# Altium PCB Auxillary_Supply_UCC28740.PcbDoc
Units mm, origin at the board's own origin, x right, y up, seen from the top; angles counter-clockwise.
Board outline 100 x 50 mm, 2 copper layers (Top Layer, Bottom Layer); 94 components, 48 nets, 255 pads, 118 vias.
Unrouted connection lines stored in the file: 93.
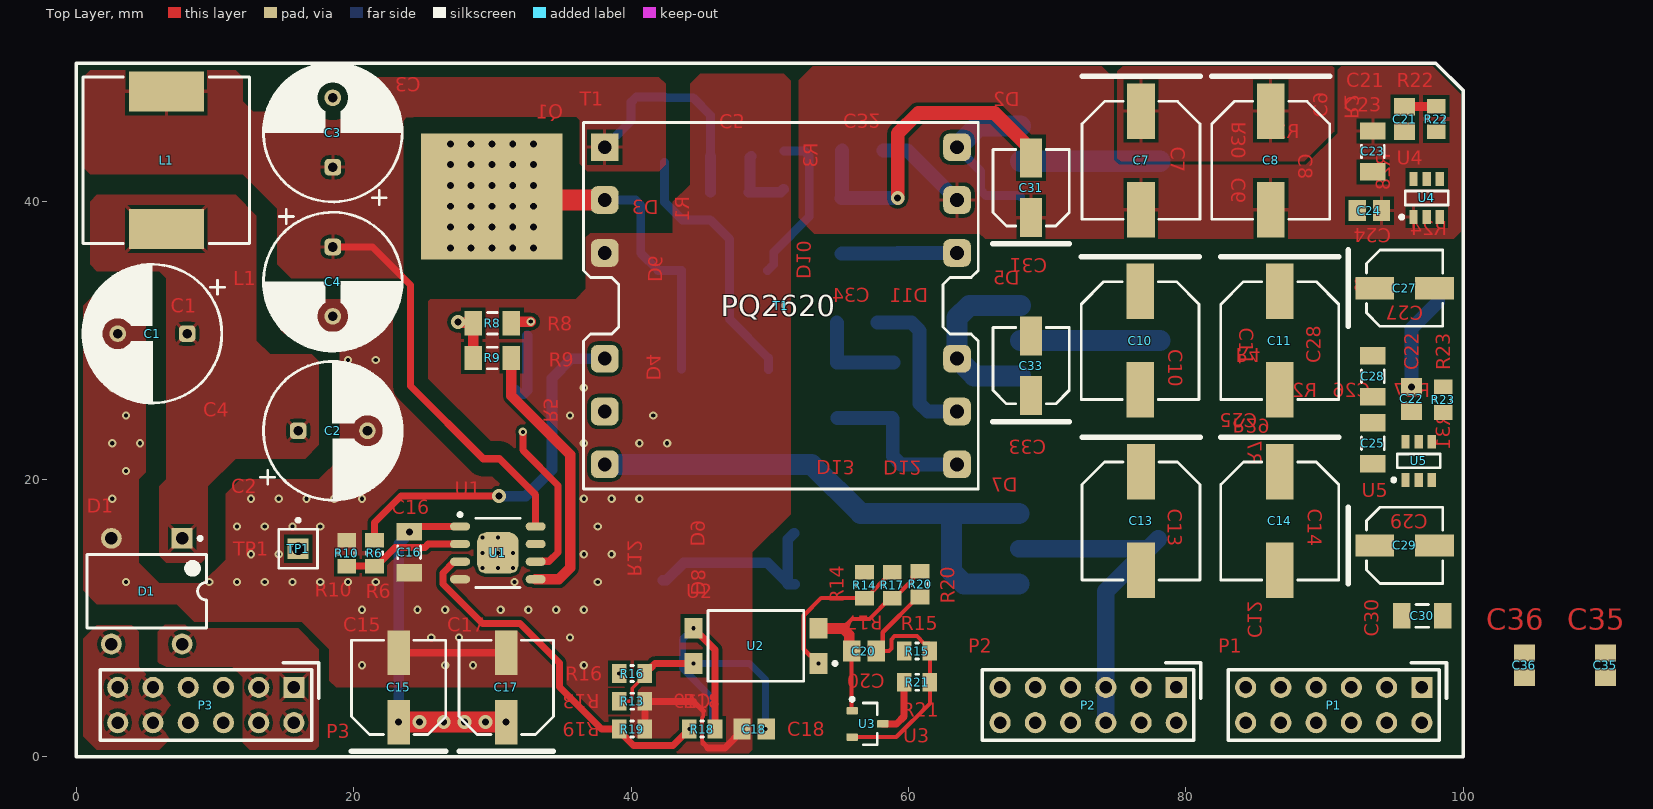
[diagram p0: Top Layer view]
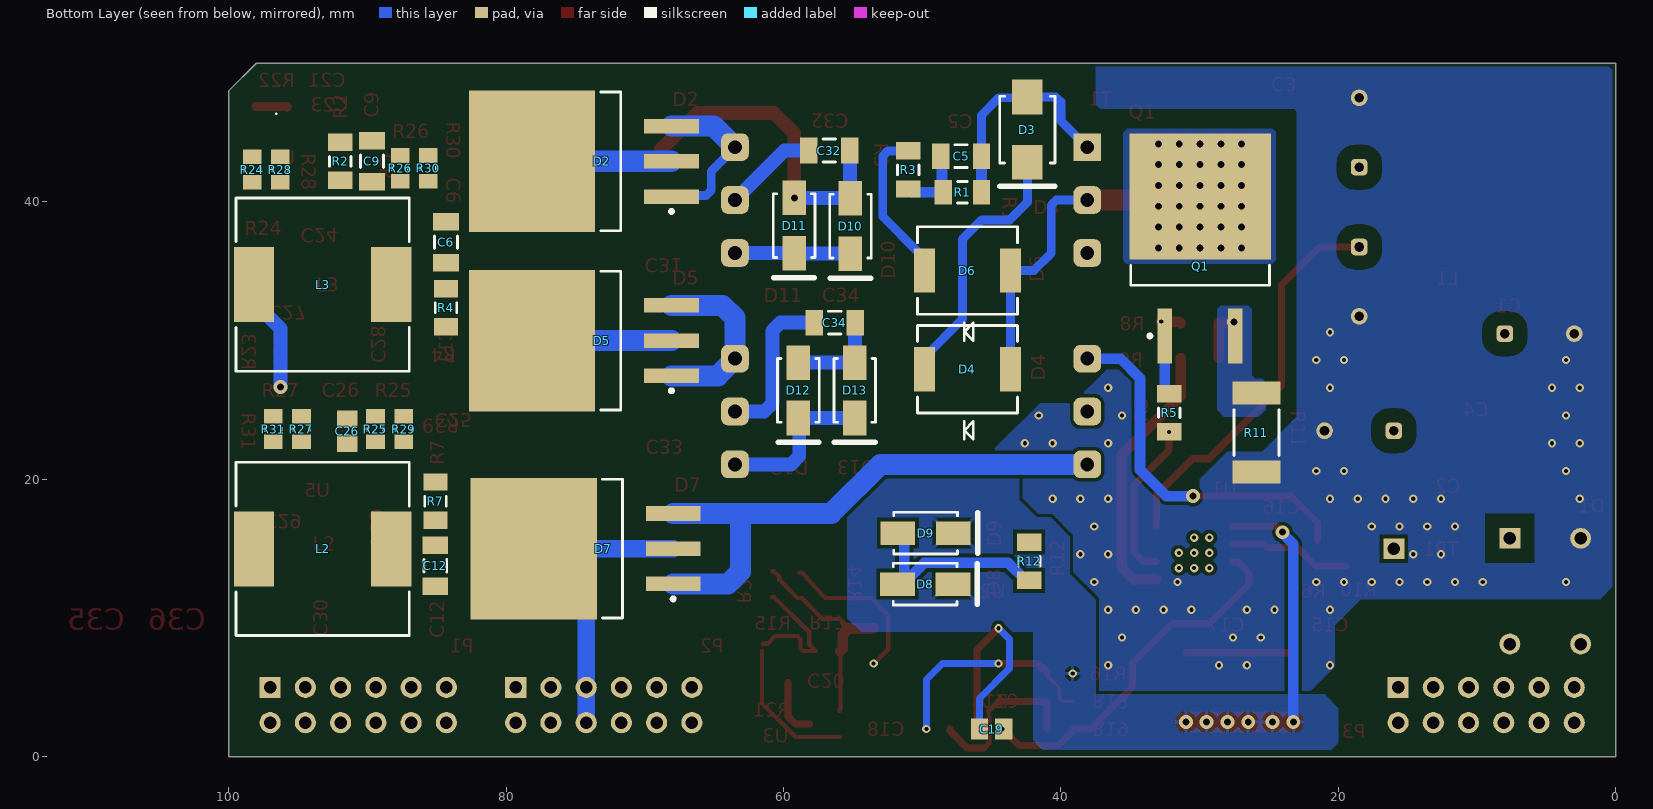
[diagram p1: Bottom Layer view, seen from below]

## Layer stack, top to bottom
Top Solder: solder mask 0.0254, SM-001, Dk 4
Top Layer: signal copper 0.0356
Dielectric 1: dielectric 0.32, FR-4, Dk 4.8
Bottom Layer: signal copper 0.0356
Bottom Solder: solder mask 0.0254, SM-001, Dk 4

## Board outline
0,0 0,50 98,50 100,48 100,0

## Design rules (kind name [scope] priority, off if disabled: settings)
AssemblyTestPointUsage [InNet('No Net')] p1:
AssemblyTestpoint [InNet('No Net')] p1: testpointundercomponent=TRUE minsize=1.016 maxsize=2.54 preferedsize=1.524 minholesize=0 maxholesize=1.016 preferedholesize=0.813 testpointgrid=0.025 usegrid=TRUE gridtolerance=0 allowsidetop=TRUE allowsidebottom=TRUE
Clearance "Schematic Clearance Constraint" [InNetClass('HV')] p1: gap=1.016 ignorepadtopadclearanceinfootprint=FALSE except(0.635: Arc-SMDPad Arc-Via Track-SMDPad Track-Via SMDPad-SMDPad SMDPad-Via)
Clearance Clearance_9 [All] p2: gap=0.254 ignorepadtopadclearanceinfootprint=FALSE except(0: Arc-Hole Track-Hole SMDPad-Hole THPad-Hole Via-Hole Fill-Hole Poly-Hole Region-Hole Text-Hole)
Clearance Clearance_8 [InNamedPolygon('GNDB')] p3: gap=0.254 ignorepadtopadclearanceinfootprint=FALSE except(0: Arc-Hole Track-Hole SMDPad-Hole THPad-Hole Via-Hole Fill-Hole Poly-Hole Region-Hole Text-Hole)
Clearance Clearance_7 [InNamedPolygon('GNDB')] p4: gap=0.254 ignorepadtopadclearanceinfootprint=FALSE except(0: Arc-Hole Track-Hole SMDPad-Hole THPad-Hole Via-Hole Fill-Hole Poly-Hole Region-Hole Text-Hole)
Clearance Clearance_6 [InNamedPolygon('GNDB')] p5: gap=0.254 ignorepadtopadclearanceinfootprint=FALSE except(0: Arc-Hole Track-Hole SMDPad-Hole THPad-Hole Via-Hole Fill-Hole Poly-Hole Region-Hole Text-Hole)
Clearance Clearance_5 [InNamedPolygon('GND_AUX')] p6: gap=0.254 ignorepadtopadclearanceinfootprint=FALSE except(0: Arc-Hole Track-Hole SMDPad-Hole THPad-Hole Via-Hole Fill-Hole Poly-Hole Region-Hole Text-Hole; 1.27: Arc-Fill Arc-Poly Arc-Region Track-Fill Track-Poly Track-Region SMDPad-Fill SMDPad-Poly SMDPad-Region THPad-Fill THPad-Poly THPad-Region Via-Fill Via-Poly Via-Region Fill-Fill Fill-Poly Fill-Region Poly-Poly Poly-Region Region-Region)
Clearance Clearance_4 [InNamedPolygon('GNDAUX')] p7: gap=0.508 ignorepadtopadclearanceinfootprint=FALSE except(0: Arc-Hole Track-Hole SMDPad-Hole THPad-Hole Via-Hole Fill-Hole Poly-Hole Region-Hole Text-Hole; 0.254: Arc-Arc Arc-Track Arc-Via Arc-Text Track-Track Track-Via Track-Text SMDPad-Via SMDPad-Text THPad-THPad THPad-Via THPad-Text Via-Via Via-Text Fill-Text Poly-Text Region-Text Text-Text)
Clearance Clearance_3 [InNamedPolygon('NONET_L01_P003')] p8: gap=0.254 ignorepadtopadclearanceinfootprint=FALSE except(0: Arc-Hole Track-Hole SMDPad-Hole THPad-Hole Via-Hole Fill-Hole Poly-Hole Region-Hole Text-Hole; 1: Arc-Fill Arc-Poly Arc-Region Track-Fill Track-Poly Track-Region SMDPad-Fill SMDPad-Poly SMDPad-Region THPad-Fill THPad-Poly THPad-Region Via-Fill Via-Poly Via-Region Fill-Fill Fill-Poly Fill-Region Poly-Poly Poly-Region Region-Region)
Clearance Clearance_2 [InNamedPolygon('HV1')] p9: gap=0.254 ignorepadtopadclearanceinfootprint=FALSE except(0: Arc-Hole Track-Hole SMDPad-Hole THPad-Hole Via-Hole Fill-Hole Poly-Hole Region-Hole Text-Hole)
Clearance Soldermask [InNamedPolygon('Top')] p10: gap=0.254 ignorepadtopadclearanceinfootprint=FALSE except(0: Arc-Hole Track-Hole SMDPad-Hole THPad-Hole Via-Hole Fill-Hole Poly-Hole Region-Hole Text-Hole; 0.5: Arc-Poly Track-Fill Track-Poly SMDPad-Fill SMDPad-Poly THPad-Fill THPad-Poly Via-Fill Via-Poly Fill-Fill Fill-Poly Poly-Poly)
Clearance Clearance_1 [InNamedPolygon('Top')] p11: gap=0.254 ignorepadtopadclearanceinfootprint=FALSE except(0: Arc-Hole Track-Hole SMDPad-Hole THPad-Hole Via-Hole Fill-Hole Poly-Hole Region-Hole Text-Hole; 0.5: Arc-Arc Arc-Track Track-Track)
Clearance [InNet('No Net')] p12: gap=0.254 ignorepadtopadclearanceinfootprint=FALSE except(0: Arc-Hole Track-Hole SMDPad-Hole THPad-Hole Via-Hole Fill-Hole Poly-Hole Region-Hole Text-Hole)
FabricationTestPointUsage [All] p1: valid=0 allowmultiple=TRUE
FabricationTestpoint [All] p1: side=3 testpointundercomponent=FALSE minsize=1.016 maxsize=2.54 preferedsize=1.524 minholesize=0 maxholesize=1.016 preferedholesize=0.813 testpointgrid=0.025 allowsidetop=TRUE allowsidebottom=TRUE usegrid=TRUE gridtolerance=0
Height [All] p1: minheight=0 maxheight=27.94 prefheight=12.7
MinimumSolderMaskSliver [All] p1: minsoldermaskwidth=0.127
PolygonConnect PolygonConnect_14 [All vs IsNamedPolygon('GNDAUX')] p1: connectstyle=Direct reliefconductorwidth=0.254 reliefentries=4 polygonreliefangle="90 Angle" airgapwidth=0.254
PolygonConnect PolygonConnect_13 [All vs IsNamedPolygon('FET_Source')] p2: connectstyle=Direct reliefconductorwidth=0.254 reliefentries=4 polygonreliefangle="90 Angle" airgapwidth=0.254
PolygonConnect PolygonConnect_12 [All vs IsNamedPolygon('FET_Source')] p3: thpad.connectstyle=Direct thpad.reliefconductorwidth=0.254 thpad.reliefentries=4 thpad.polygonreliefangle="90 Angle" thpad.airgapwidth=0.254 smdpad.connectstyle=Direct smdpad.reliefconductorwidth=0.254 smdpad.reliefentries=4 smdpad.polygonreliefangle="90 Angle" smdpad.airgapwidth=0.254 via.connectstyle=Relief via.reliefconductorwidth=0.254 via.reliefentries=4 via.polygonreliefangle="90 Angle" via.airgapwidth=0.254
PolygonConnect PolygonConnect_11 [All vs IsNamedPolygon('VCC_AUX')] p4: thpad.connectstyle=Relief thpad.reliefconductorwidth=0.254 thpad.reliefentries=4 thpad.polygonreliefangle="45 Angle" thpad.airgapwidth=0.254 smdpad.connectstyle=Relief smdpad.reliefconductorwidth=0.254 smdpad.reliefentries=4 smdpad.polygonreliefangle="45 Angle" smdpad.airgapwidth=0.254 via.connectstyle=Relief via.reliefconductorwidth=0.254 via.reliefentries=4 via.polygonreliefangle="90 Angle" via.airgapwidth=0.254
PolygonConnect PolygonConnect_10 [All vs IsNamedPolygon('FET_Source')] p5: thpad.connectstyle=Direct thpad.reliefconductorwidth=0.254 thpad.reliefentries=4 thpad.polygonreliefangle="90 Angle" thpad.airgapwidth=0.254 smdpad.connectstyle=Direct smdpad.reliefconductorwidth=0.254 smdpad.reliefentries=4 smdpad.polygonreliefangle="90 Angle" smdpad.airgapwidth=0.254 via.connectstyle=Relief via.reliefconductorwidth=0.254 via.reliefentries=4 via.polygonreliefangle="90 Angle" via.airgapwidth=0.254
PolygonConnect PolygonConnect_9 [All vs IsNamedPolygon('GND_AUX')] p6: thpad.connectstyle=Direct thpad.reliefconductorwidth=0.254 thpad.reliefentries=4 thpad.polygonreliefangle="90 Angle" thpad.airgapwidth=0.254 smdpad.connectstyle=Direct smdpad.reliefconductorwidth=0.254 smdpad.reliefentries=4 smdpad.polygonreliefangle="90 Angle" smdpad.airgapwidth=0.254 via.connectstyle=Relief via.reliefconductorwidth=0.254 via.reliefentries=4 via.polygonreliefangle="90 Angle" via.airgapwidth=0.254
PolygonConnect PolygonConnect_8 [All vs IsNamedPolygon('FET_Drain')] p7: thpad.connectstyle=Direct thpad.reliefconductorwidth=0.254 thpad.reliefentries=4 thpad.polygonreliefangle="90 Angle" thpad.airgapwidth=0.254 smdpad.connectstyle=Direct smdpad.reliefconductorwidth=0.254 smdpad.reliefentries=4 smdpad.polygonreliefangle="90 Angle" smdpad.airgapwidth=0.254 via.connectstyle=Relief via.reliefconductorwidth=0.254 via.reliefentries=4 via.polygonreliefangle="90 Angle" via.airgapwidth=0.254
PolygonConnect PolygonConnect_7 [All vs IsNamedPolygon('FET_Source')] p8: thpad.connectstyle=Direct thpad.reliefconductorwidth=0.254 thpad.reliefentries=4 thpad.polygonreliefangle="90 Angle" thpad.airgapwidth=0.254 smdpad.connectstyle=Direct smdpad.reliefconductorwidth=0.254 smdpad.reliefentries=4 smdpad.polygonreliefangle="90 Angle" smdpad.airgapwidth=0.254 via.connectstyle=Relief via.reliefconductorwidth=0.254 via.reliefentries=4 via.polygonreliefangle="90 Angle" via.airgapwidth=0.254
PolygonConnect PolygonConnect_6 [All vs IsNamedPolygon('FET_Drain')] p9: thpad.connectstyle=Direct thpad.reliefconductorwidth=0.254 thpad.reliefentries=4 thpad.polygonreliefangle="90 Angle" thpad.airgapwidth=0.254 smdpad.connectstyle=Direct smdpad.reliefconductorwidth=0.254 smdpad.reliefentries=4 smdpad.polygonreliefangle="90 Angle" smdpad.airgapwidth=0.254 via.connectstyle=Relief via.reliefconductorwidth=0.254 via.reliefentries=4 via.polygonreliefangle="90 Angle" via.airgapwidth=0.254
PolygonConnect PolygonConnect_5 [All vs IsNamedPolygon('FET_Source')] p10: thpad.connectstyle=Direct thpad.reliefconductorwidth=0.254 thpad.reliefentries=4 thpad.polygonreliefangle="90 Angle" thpad.airgapwidth=0.254 smdpad.connectstyle=Direct smdpad.reliefconductorwidth=0.254 smdpad.reliefentries=4 smdpad.polygonreliefangle="90 Angle" smdpad.airgapwidth=0.254 via.connectstyle=Relief via.reliefconductorwidth=0.254 via.reliefentries=4 via.polygonreliefangle="90 Angle" via.airgapwidth=0.254
PolygonConnect PolygonConnect_4 [All vs IsNamedPolygon('GNDAUX')] p11: connectstyle=Relief reliefconductorwidth=0.254 reliefentries=4 polygonreliefangle="90 Angle" airgapwidth=0.254
PolygonConnect PolygonConnect_3 [All vs IsNamedPolygon('GNDAUX')] p12: thpad.connectstyle=Direct thpad.reliefconductorwidth=0.254 thpad.reliefentries=4 thpad.polygonreliefangle="90 Angle" thpad.airgapwidth=0.254 smdpad.connectstyle=Direct smdpad.reliefconductorwidth=0.254 smdpad.reliefentries=4 smdpad.polygonreliefangle="90 Angle" smdpad.airgapwidth=0.254 via.connectstyle=Relief via.reliefconductorwidth=0.254 via.reliefentries=4 via.polygonreliefangle="90 Angle" via.airgapwidth=0.254
PolygonConnect PolygonConnect_2 [All vs IsNamedPolygon('GNDAUX') Or IsNamedPolygon('HV1') Or IsNamedPolygon('FET_Source') Or IsNamedPolygon('LIVE') Or IsNamedPolygon('NEUTRAL')] p13: connectstyle=Relief reliefconductorwidth=0.254 reliefentries=4 polygonreliefangle="45 Angle" airgapwidth=0.254
PolygonConnect PolygonConnect_1 [All vs IsNamedPolygon('HV1')] p14: connectstyle=Relief reliefconductorwidth=0.254 reliefentries=4 polygonreliefangle="90 Angle" airgapwidth=0.254
PolygonConnect [All] p15: connectstyle=Relief reliefconductorwidth=0.254 reliefentries=4 polygonreliefangle="90 Angle" airgapwidth=0.254
RoutingVias [All] p1: holewidth=0.3 width=0.6 viastyle="Through Hole" minholewidth=0.3 minwidth=0.6 maxholewidth=1 maxwidth=2
SilkToSilkClearance [All] p1: silktosilkclearance=0.2
SilkToSolderMaskClearance [IsPad] p1: minsilkscreentomaskgap=0.2 clearancetoexposedcopper=TRUE
SolderMaskExpansion [All] p1: expansion=0.102 istentingtop=FALSE
UnRoutedNet [All] p1: checkbadconnections=TRUE
Width [All] p1: maxlimit=1.524 minlimit=0.254 preferedwidth=0.762 minimp=50.000000 maximp=50.000000 favimp=50.000000
21 further rules are at their usual default settings.

## Classes and differential pairs
net class HV: HV LIVE NetC1_1 NetD4_1

## Components (designator, comment, footprint, x,y, rotation, side; value= is the part's Value field where it differs from the comment)
C1 "400V" 10UF_400V 8,30.5 r180 top value=10uF
C2 "400V" 10UF_400V 16,23.5 r0 top value=10uF
C3 "400V" 10UF_400V 18.5,42.5 r90 top value=10uF
C4 "400V" 10UF_400V 18.5,36.75 r270 top value=10uF
C5 "Cap_1206" CHIP_CAP_1206 47.2,43.3 r180 bottom value=100pF
C6 "Cap_1206" CHIP_CAP_1206 84.328,37.084 r270 bottom value=100pF
C7 "100uF" PNSC-FK-V-F_V 76.762,43 r270 top
C8 "100uF" PNSC-FK-V-F_V 86.106,43 r270 top
C9 "Cap_1206" CHIP_CAP_1206 89.662,42.926 r270 bottom value=100pF
C10 "100uF" PNSC-FK-V-F_V 76.698,30 r270 top
C11 "100uF" PNSC-FK-V-F_V 86.762,30 r270 top
C12 "Cap_1206" CHIP_CAP_1206 85.09,13.765 r270 bottom value=100pF
C13 "100uF" PNSC-FK-V-F_V 76.762,17 r270 top
C14 "100uF" PNSC-FK-V-F_V 86.762,17 r270 top
C15 "47uF" PNSC-FP-V-D_V 23.25,5 r90 top
C16 "Cap_1206" CHIP_CAP_1206 24,14.75 r90 top value=100nF
C17 "47uF" PNSC-FP-V-D_V 31,5 r90 top
C18 "Cap_0805" CHIP_CAP_0805 48.875,2 r0 top value=100pF
C19 "Cap_0805" CHIP_CAP_0805 45,2 r180 bottom value=100pF
C20 "Cap_0805" CHIP_CAP_0805 56.79,7.62 r0 top value=100pF
C21 "Cap_0805" CHIP_CAP_0805 95.758,45.974 r270 top value=100pF
C22 "Cap_0805" CHIP_CAP_0805 96.266,25.795 r90 top value=100pF
C23 "Cap_1206" CHIP_CAP_1206 93.472,43.639 r90 top value=10uF
C24 "Cap_0805" CHIP_CAP_0805 93.218,39.37 r0 top value=100pF
C25 "Cap_1206" CHIP_CAP_1206 93.472,22.606 r90 top value=10uF
C26 "Cap_0805" CHIP_CAP_0805 91.44,23.481 r90 bottom value=100pF
C27 "EEEFP1E220AR" PNSC-FP-V-C_V 95.758,33.782 r0 top
C28 "Cap_1206" CHIP_CAP_1206 93.472,27.432 r270 top value=100nF
C29 "EEEFP1E220AR" PNSC-FP-V-C_V 95.758,15.24 r0 top
C30 "Cap_1206" CHIP_CAP_1206 97.028,10.16 r180 top value=100nF
C31 "EEEFP1E220AR" PNSC-FP-V-C_V 68.834,41.021 r90 top
C32 "Cap_1206" Chip_CAP_1206 56.7,43.7 r180 bottom value=100nF
C33 "EEEFP1E220AR" PNSC-FP-V-C_V 68.834,28.194 r90 top
C34 "Cap_1206" Chip_CAP_1206 56.3,31.3 r180 bottom value=100nF
C35 "Cap_0805" Chip_CAP_0805 110.236,6.604 r90 top value=100pF
C36 "Cap_0805" Chip_CAP_0805 104.394,6.604 r90 top value=100pF
D1 "DF10M" DF10M 5.09,11.938 r270 top
D2 "STPS3030C6" DPAK254P1542X450-4N 74.422,42.926 r0 bottom
D3 "SMBJ33A" FAIR-DO-214AA-2_V 42.418,45.212 r270 bottom
D4 "SS36-E3/57T" VISH-DO-214AB-2_V 46.736,27.94 r0 bottom
D5 "STPS3030C6" DPAK254P1542X450-4N 74.422,30 r0 bottom
D6 "SS36-E3/57T" VISH-DO-214AB-2_V 46.736,35.052 r0 bottom
D7 "STPS3030C6" DPAK254P1542X450-4N 74.3,15 r0 bottom
D8 "B360A-13-F" DIOD-B360A_V 49.784,12.446 r180 bottom
D9 "B360A-13-F" DIOD-B360A_V 49.752,16.129 r180 bottom
D10 "B360A-13-F" DIOD-B360A_V 55.172,38.258 r270 bottom
D11 "B360A-13-F" DIOD-B360A_V 59.236,38.29 r270 bottom
D12 "B360A-13-F" DIOD-B360A_V 58.928,26.416 r270 bottom
D13 "B360A-13-F" DIOD-B360A_V 54.864,26.416 r270 bottom
L1 "CDRH127NP-100MC" SUMI-CDRH127_V 6.5,43 r180 top
L2 "5.6uH" WE-PD-L 93.218,14.986 r180 bottom
L3 "5.6uH" WE-PD-L 93.218,34.036 r180 bottom
P1 "Header 6X2H" HEADER_6X2 97,5 r270 top
P2 "Header 6X2H" HEADER_6X2 79.3,5 r270 top
P3 "Header 6X2H" HEADER_6X2 15.7,5 r270 top
Q1 "NMOS-2" "DPAK254P1542X450-3N - THERMAL" 29.972,36.686 r90 bottom
R1 "Res_1206" CHIP_RES_1206 47.1,40.7 r180 bottom value=1K
R2 "Res_1206" CHIP_RES_1206 91.948,42.926 r270 bottom value=10K
R3 "Res_1206" CHIP_RES_1206 51,42.3 r270 bottom value=1K
R4 "Res_1206" CHIP_RES_1206 84.328,32.363 r90 bottom value=10K
R5 "Res_1206" CHIP_RES_1206 32.2,24.8 r90 bottom value=10E
R6 "Res_0805" CHIP_RES_0805 21.5,14.675 r90 top value=105K
R7 "Res_1206" CHIP_RES_1206 85.09,18.437 r270 bottom value=10K
R8 "Res_1206" CHIP_RES_1206 30,31.25 r0 top value=10K
R9 "Res_1206" CHIP_RES_1206 30,28.75 r180 top value=1.5K
R10 "Res_0805" CHIP_RES_0805 19.5,14.675 r270 top value=28.7K
R11 "Res_2512" CHIP2PINSM127P600-8N_2512 25.908,23.368 r90 bottom value=0.56E
R12 "Res_1206" CHIP_RES_1206 42.291,14.097 r90 bottom value=JUMPER
R13 "Res_0805" CHIP_RES_0805 40.075,4 r0 top value=10K
R14 "Res_0805" CHIP_RES_0805 56.83,12.37 r90 top value=1K
R15 "Res_0805" CHIP_RES_0805 60.615,7.62 r0 top value=180K
R16 "Res_0805" CHIP_RES_0805 40.075,6 r180 top value=1E
R17 "Res_0805" CHIP_RES_0805 58.83,12.37 r90 top value=1K
R18 "Res_0805" CHIP_RES_0805 45.125,2 r0 top value=205K
R19 "Res_0805" CHIP_RES_0805 40.075,2 r180 top value=18.7K
R20 "Res_0805" CHIP_RES_0805 60.83,12.445 r90 top value=NC
R21 "Res_0805" CHIP_RES_0805 60.615,5.37 r0 top value=39K
R22 "Res_0805" CHIP_RES_0805 98.044,45.974 r270 top value=105K
R23 "Res_0805" CHIP_RES_0805 98.552,25.745 r90 top value=105K
R24 "Res_0805" CHIP_RES_0805 98.298,42.327 r90 bottom value=15.49K
R25 "Res_0805" CHIP_RES_0805 89.408,23.622 r90 bottom value=15.49K
R26 "Res_0805" CHIP_RES_0805 87.63,42.418 r90 bottom value=105K
R27 "Res_0805" CHIP_RES_0805 94.742,23.622 r90 bottom value=105K
R28 "Res_0805" CHIP_RES_0805 96.266,42.327 r90 bottom value=5.49K
R29 "Res_0805" CHIP_RES_0805 87.376,23.622 r90 bottom value=5.49K
R30 "Res_0805" CHIP_RES_0805 85.598,42.418 r90 bottom value=105K
R31 "Res_0805" CHIP_RES_0805 96.774,23.622 r90 bottom value=105K
T1 "EE25-Epcos Horizontal_12_Pin" PQ26_20 50.8,32.512 r0 top
TP1 "Test Point" PIN1 16,15 r0 top
U1 "UCC28740-Q1" SOIC127P570X175_HS-9N 30.4,14.7 r0 top
U2 "PC817" LTV-817 49,8 r180 top
U3 "TL431ACDBZR" DBZ0003A_L 57.04,2.37 r0 top
U4 "TPS56339DDCR" SOT95P278X110-6N 97.348,40.281 r90 top value=Value
U5 "TPS56339DDCR" SOT95P278X110-6N 96.774,21.336 r90 top value=Value

## Footprints (in the part's own frame and the unit in brackets; to place one, negate y for a bottom-side part, rotate by r counter-clockwise, add the part's x,y. Pads: shape width x height; smd on the part's side, far side on the other; paste and mask are expansions set on the pad)
10UF_400V [mm]
  rrect50% 1.2x1.2 hole 0.7: 1(0,0)
  round 1.2 hole 0.7: 2(5,0)
  silkscreen extent -9.05,-5 7.5,6, body extent -2.5,-5 7.5,5, height 10.5
CHIP2PINSM127P600-8N_2512 [mm]
  rect 1.65x3.45 smd: 1(-2.85,0) 2(2.85,0)
  silkscreen extent -1.65,-1.63 1.65,1.63, body extent -3.3,-1.72 3.3,1.72, height 0.8
CHIP_CAP_0805 [mm]
  rect 1.25x1.5 smd: 1(-0.875,0) 2(0.875,0)
  body extent -1.1,-0.72 1.1,0.72, height 1.2
Chip_CAP_0805 [mm]
  rect 1.25x1.5 smd: 1(-0.875,0) 2(0.875,0)
  body extent -1.1,-0.72 1.1,0.72, height 1.2
CHIP_CAP_1206 [mm]
  rect 1.25x1.85 smd: 1(-1.475,0) 2(1.475,0)
  silkscreen extent -0.45,-0.82 0.45,0.82, body extent -1.7,-0.9 1.7,0.9, height 1.4
Chip_CAP_1206 [mm]
  rect 1.25x1.85 smd: 1(-1.475,0) 2(1.475,0)
  silkscreen extent -0.45,-0.82 0.45,0.82, body extent -1.7,-0.9 1.7,0.9, height 1.4
CHIP_RES_0805 [mm]
  rect 1.05x1.35 smd: 1(-0.925,0) 2(0.925,0)
  silkscreen extent -0.1,-0.58 0.1,0.58, body extent -1.07,-0.67 1.07,0.67, height 0.5
CHIP_RES_1206 [mm]
  rect 1.25x1.75 smd: 1(-1.375,0) 2(1.375,0)
  silkscreen extent -0.35,-0.77 0.35,0.77, body extent -1.63,-0.87 1.63,0.87, height 0.55
DBZ0003A_L [mm] "SOT23, 3-Leads, Body 3.04x1.4mm, Pitch 0.95mm, IPC High Density"
  rrect18% 0.8x0.55 smd: 1(-1.1,0.95) 2(-1.1,-0.95) 3(1.1,0)
  silkscreen extent -1.22,-1.5 0.7,1.9, body extent -1.26,-1.46 1.26,1.46, height 0.96
DF10M [mm]
  rect 1.5x1.5 hole 0.9: 1(-3.81,2.55)
  round 1.5 hole 0.9: 2(-3.81,-2.55) 3(3.81,-2.55) 4(3.81,2.55)
  silkscreen extent -3.93,-4.3 2.65,4.3, body extent -4.01,-4.32 4.01,4.18, height 3.5
DIOD-B360A_V [mm] "Molded Diode, 2-Leads, Body 4.60x2.92mm"
  rect 2.5x1.7 smd: 1(-2,0) 2(2,0)
  silkscreen extent -2.3,-1.5 3.75,1.5, body extent -2.52,-1.46 2.52,1.46, height 2.3
"DPAK254P1542X450-3N - THERMAL" [mm] "D2-PAK, 3-Pads, Body 7.60x8.36mm (max), IPC Medium Density"
  rect 3.95x1.05 smd: 1(-6.35,2.54) 3(-6.35,-2.54)
  rect 9.1x10.2 smd far side: 2(3.7,0)
  rect 9.1x10.2 smd: 2(3.7,0)
  silkscreen extent -6.47,-5 -1.25,5, body extent -7.5,-5 7.5,5, height 4.67
DPAK254P1542X450-4N [mm] "D2-PAK, 3-Pads, Body 7.60x8.36mm (max), IPC Medium Density"
  rect 3.95x1.05 smd: 1(-6.35,-2.54) 1(-6.35,2.54) 2(-6.35,0)
  rect 9.1x10.2 smd: 2(3.7,0)
  silkscreen extent -6.47,-5 -1.25,5, body extent -7.5,-5 7.5,5, height 4.42
FAIR-DO-214AA-2_V [mm] "Molded Diode, 2-Leads, Body 4.75x3.95mm"
  rect 2.5x2.2 smd: 1(-2.35,0) 2(2.35,0)
  silkscreen extent -2.4,-2 4.1,2, body extent -2.59,-1.97 2.6,1.98, height 2.65
HEADER_6X2 [mil]
  rect 60x60 hole 35.43: 1(0,0)
  round 60 hole 35.43: 2(100,0) 3(0,-100) 4(100,-100) 5(0,-200) 6(100,-200) 7(0,-300) 8(100,-300) 9(0,-400) 10(100,-400) 11(0,-500) 12(100,-500)
  silkscreen extent -70,-550 150,70, body extent -13,-550 495,50, height 200
LTV-817 [mm]
  rect 1.3x1.5 smd: 1(-4.5,1.27) 2(-4.5,-1.27) 3(4.5,-1.27) 4(4.5,1.27)
  silkscreen extent -5.83,-2.55 3.45,2.55, body extent -4.48,-2.6 4.48,2.6, height 3.68
PIN1 [mm] "Connector; Plug"
  rect 1.5x1.5 hole 0.9: 1(0,0)
  silkscreen extent -1.4,-1.4 1.4,2.17
PNSC-FK-V-F_V [mm] "CAPAE, 2-Leads, Body 8.50x8.50mm"
  rect 4x2 smd: 1(-3.55,0) 2(3.55,0)
  silkscreen extent -6.05,-4.25 4.25,4.25, body extent -5,-4.25 5,4.25, height 10.5
PNSC-FP-V-C_V [mm] "CAPAE, 2-Leads, Body 5.50x5.50mm"
  rect 2.8x1.6 smd: 1(-2.15,0) 2(2.15,0)
  silkscreen extent -4.05,-2.75 2.75,2.75, body extent -3.25,-2.75 3.25,2.75, height 6.1
PNSC-FP-V-D_V [mm] "CAPAE, 2-Leads, Body 6.80x6.80mm"
  rect 3.2x1.6 smd: 1(-2.5,0) 2(2.5,0)
  silkscreen extent -4.6,-3.4 3.4,3.4, body extent -3.9,-3.4 3.9,3.4, height 6.1
PQ26_20 [mm]
  rect 2x2 hole 1: 1(-12.7,11.43)
  rrect50% 2x2 hole 1: 2(-12.7,7.62) 3(-12.7,3.81) 4(-12.7,-3.81) 5(-12.7,-7.62) 6(-12.7,-11.43) 7(12.7,-11.43) 8(12.7,-7.62) 9(12.7,-3.81) 10(12.7,3.81) 11(12.7,7.62) 12(12.7,11.43)
  silkscreen extent -14.22,-13.21 14.22,13.21, body extent -14.75,-13.65 14.75,13.65, height 22.65
SOIC127P570X175_HS-9N [mm] "SOIC, 8-Leads, Body 4.91x3.90mm, Pitch 1.27mm, Thermal Pad 3.00x3.00mm, IPC Medium Density"
  oval 1.45x0.6 smd: 1(-2.725,1.905) 2(-2.725,0.635) 3(-2.725,-0.635) 4(-2.725,-1.905) 5(2.725,-1.905) 6(2.725,-0.635) 7(2.725,0.635) 8(2.725,1.905)
  rrect50% 3x3 smd: 9(0,0)
  silkscreen extent -2.85,-2.5 1.6,2.88, body extent -2.77,-2.5 2.77,2.5, height 1.75
SOT95P278X110-6N [mm] "SOT23, 6-Leads, Body 2.90x2.78mm, Pitch 0.95mm, IPC Medium Density"
  rect 1x0.6 smd: 1(-1.375,0.95) 2(-1.375,0) 3(-1.375,-0.95) 4(1.375,-0.95) 5(1.375,0) 6(1.375,0.95)
  silkscreen extent -1.5,-1.55 0.5,1.92, body extent -1.53,-1.53 1.53,1.53, height 1.1
SUMI-CDRH127_V [mm] "SMD, 2-Leads, Body 12x12mm"
  rect 5.4x2.9 smd: 1(0,4.95) 2(0,-4.95)
  silkscreen extent -6,-6 6,6, body extent -6,-6.1 6,6.1, height 8.4
VISH-DO-214AB-2_V [mm] "Molded Diode, 2-Leads, Body 7.11x6.22mm"
  rect 1.52x3.2 smd: 1(-3.105,0) 2(3.105,0)
  silkscreen extent -3.6,-3.15 3.6,5.04, body extent -3.77,-3.11 3.78,3.11, height 2.62
WE-PD-L [mm] "SMD Inductor, 2-Leads, Body 12.0 x 12.0 mm"
  rect 2.9x5.4 smd: 1(-4.95,0) 2(4.95,0)
  silkscreen extent -6.25,-6.25 6.25,6.25, body extent -6,-6 6,6, height 5.98

## Part data
C1 C2 C3 C4: library part "Cap Pol1", "Polarized Capacitor (Radial)", LatestRevisionDate=17-Jul-2002, LatestRevisionNote="Re-released for DXP Platform.", PackageDescription="Polarized Capacitor (Radial); 2 Leads", PackageReference=RB7.6-15, Published=8-Jun-2000, Publisher="Altium Limited"
C5 C6 C9 C12 C16 C18 C19 C20 C21 C22 C23 C24 C25 C26 C28 C30 C32 C34 C35 C36: library part Cap, "Capacitor", LatestRevisionDate=17-Jul-2002, LatestRevisionNote="Re-released for DXP Platform.", PackageDescription="Radial Cap, Thru-Hole; 2 Leads; 0.3 in Pin Spacing", PackageReference=RAD-0.3, Published=8-Jun-2000, Publisher="Altium Limited"
  C18 C19 C21 C22 C24 C26 C35 C36: Size=100nF
  C20: Size=1.2nF
C7 C8 C10 C11 C13 C14: library part CMP-2000-06208-1, "Aluminum Electrolytic Capacitor, 100 uF, +/- 20%, 50 V, 2-Pin SMD (Size Code F), -55 to 105 degC, RoHS, Tape and Reel", Capacitance=100µF, Case Size/Dimension=Ø8x10.2mm, Lifetime@Temperature=2000Hrs@105°C, Manufacturer=Panasonic, Operating Temp Range=-55to+105°C, Operating Temp-Max=105°C, Package Description="2-Pin Electrolytic Aluminum Capacitor, Body 8.3 x 8.3 mm", Package Reference=FK-V-F, Rated Voltage=50V, Ripple Current=350mA, Datasheet URL=http://industrial.panasonic.com/cdbs/www-data/pdf/RDE0000/ABA0000C1181.pdf, Datasheet Version=03/2016, Impedance=0.34O, Manufacturer URL=http://www.panasonic.com/, Mounting Technology=SurfaceMount, Package URL=http://industrial.panasonic.com/cdbs/www-data/pdf/RDE0000/DME0000COL48.pdf, Series=FK, Type=Can
C15 C17: library part CMP-2000-06216-1, "Aluminum Electrolytic Capacitor, 47 uF, +/- 20%, 35 V, 2-Pin SMD (Size Code D), -55 to 105 degC, RoHS, Tape and Reel", Capacitance=47µF, Case Size/Dimension=Ø6.3x5.8mm, ESR (Equivalent Series Resistance)=0.26O, Lifetime@Temperature=2000Hrs@105°C, Manufacturer=Panasonic, Operating Temp Range=-55to+105°C, Operating Temp-Max=105°C, Package Description="2-Pin Electrolytic Aluminum Capacitor, Body 6.6 x 6.6 mm", Package Reference=FP-V-D, Rated Voltage=35V, Ripple Current=300mA, Datasheet URL=http://industrial.panasonic.com/cdbs/www-data/pdf/RDE0000/ABA0000C1184.pdf, Datasheet Version=03/2016, Manufacturer URL=http://www.panasonic.com/, Mounting Technology=SurfaceMount, Package URL=http://industrial.panasonic.com/cdbs/www-data/pdf/RDE0000/DME0000COL48.pdf, Series=FP, Type=Can
C27 C29 C31 C33: library part CMP-2000-06213-1, "Aluminum Electrolytic Capacitor, 22 uF, +/- 20%, 25 V, 2-Pin SMD (Size Code C), -55 to 105 degC, RoHS, Tape and Reel", Capacitance=22µF, Case Size/Dimension=Ø5x5.8mm, ESR (Equivalent Series Resistance)=0.36O, Lifetime@Temperature=2000Hrs@105°C, Manufacturer=Panasonic, Operating Temp Range=-55to+105°C, Operating Temp-Max=105°C, Package Description="2-Pin Electrolytic Aluminum Capacitor, Body 5.3 x 5.3 mm", Package Reference=FP-V-C, Rated Voltage=25V, Ripple Current=240mA, Datasheet URL=http://industrial.panasonic.com/cdbs/www-data/pdf/RDE0000/ABA0000C1184.pdf, Datasheet Version=03/2016, Manufacturer URL=http://www.panasonic.com/, Mounting Technology=SurfaceMount, Package URL=http://industrial.panasonic.com/cdbs/www-data/pdf/RDE0000/DME0000COL48.pdf, Series=FP, Type=Can
D2 D5 D7: library part 11DQ06, "Schottky Rectifier", Code_JEDEC=DO-204-AL, ComponentLink1Description="Manufacturer Link", ComponentLink1URL=http://www.irf.com/, ComponentLink2Description=Datasheet, ComponentLink2URL=http://www.irf.com/product-info/datasheets/data/11dq05.pdf, DatasheetVersion=Dec-1997, LatestRevisionDate=17-Jul-2002, LatestRevisionNote="Re-released for DXP Platform.", PackageDescription="Diode, Axial; Body 5.2 x 2.7 mm (LxDia. max), Lead Dia. 0.86 mm (max)", PackageReference=DO-204AL, Published=8-Jun-2000, Publisher="Altium Limited"
D3: library part CMP-2000-07095-1, "Transient Voltage Suppressor, 600 W, 33 V, -55 to 150 degC, 2-Pin SMD, RoHS, Tape and Reel", Manufacturer=FairchildSemiconductor, Maximum Clamping Voltage=53.3V, Maximum Peak Pulse Current=11.3A, Maximum Reverse Leakage Current=5uA, Maximum Reverse Stand-off Voltage=33V, Minimum Breakdown Voltage=36.7V, Operating Temperature=-55to150°C, Package=2DO-214AA, Package Description="2-Pin Surface Mount Device, Body 4.4 x 3.625 mm", Package Reference=DO-214AA-2, Peak Pulse Power Dissipation=600W, Test Current=1mA, Category=TVS, Configuration=Single, Datasheet URL=https://www.fairchildsemi.com/datasheets/SM/SMBJ33A.pdf, Datasheet Version="Rev. 1.1.1, 11/2014", Direction Type=Uni-Directional, Manufacturer URL=https://www.fairchildsemi.com/, Mounting=SurfaceMount, Mounting Technology=SurfaceMount, Packaging=Tape&Reel, Rad Hard=No
D4 D6: library part CMP-2000-07150-1, "Surface Mount Schottky Barrier Rectifier, 60 V, 3 A, -55 to 150 degC, 2-Pin SMC (DO-214AB), RoHS, Tape and Reel", Diode Case Style=DO-214AB, Forward Current If(AV)=3A, Forward Surge Current Ifsm Max=100A, Forward Voltage VF Max=750mV, Manufacturer=Vishay, Operating Temperature Max=150°C, Package Description="2-Pin Surface Mount Device, Body 6.855 x 5.905 mm", Repetitive Reverse Voltage Vrrm Max=60V, Datasheet URL=http://www.vishay.com/docs/88751/ss32.pdf, Datasheet Version=08/2015, Diode Configuration=Single, Diode Type=Schottky, Manufacturer URL=http://www.vishay.com/, Mounting Technology=SurfaceMount, No. of Pins=2Pins, Package Reference=DO-214AB, Packaging=CutTape, Product Range=-, SVHC=ToBeAdvised
D8 D9 D10 D11 D12 D13: library part CMP-2000-05898-1, "Schottky Barrier Rectifier, 3 A, -55 to 150 degC, 2-Pin Molded, RoHS, Tape and Reel", If - Forward Current=3A, Ifsm - Forward Surge Current=80A, Ir - Reverse Current=500uA, Manufacturer=DiodesIncorporated, Maximum Operating Temperature=+125C, Minimum Operating Temperature=-55C, Operating Temperature Range=-55Cto+125C, Package / Case=SMA, Package Description="2-Pin Surface Mount Device, Body 4.3 x 2.605 mm", Package Reference=B360A, Vf - Forward Voltage=0.7V, Vrrm - Repetitive Reverse Voltage=60V, Brand=DiodesIncorporated, Configuration=Single, Datasheet URL=https://datasheet.ciiva.com/914/ds30891-914080.pdf, Datasheet Version="Rev. 15-2, 09/2014", Factory Pack Quantity=5000, Height=2.3mm, Length=4.6mm, Manufacturer URL=http://www.diodes.com/, Mounting Style=SMD/SMT, Mounting Technology=SurfaceMount, Packaging=Reel, Product=SchottkyDiodes, Product Category=SchottkyDiodes&Rectifiers, RoHS=True, Series=B360, Technology=Si, Termination Style=SMD/SMT, Type=SchottkyBarrierRectifier, Unit Weight=0.002258oz, Width=2.92mm
L1: library part CMP-2000-06084-1, "Power Inductor, 10 uH, +/- 20%, -40 to 100 degC, 2-Pin SMD, RoHS, Tape and Reel", Current - Saturation=-, Current Rating=5.4A, DC Resistance (DCR)=21.6mOhmMax, Frequency - Test=1kHz, Inductance=10µH, Manufacturer=Sumida, Operating Temperature=-40°C~100°C, Package / Case=Nonstandard, Package Description="2-Pin Surface Mount Device, Body 12 x 12 mm", Package Reference=CDRH127, Standard Package=1, Tolerance=±20%, Catalog Drawings=CDRH127SeriesFrontCDRH127SeriesSideCDRH127SeriesBottom, Category=Inductors,Coils,Chokes, Datasheet URL=http://products.sumida.com/products/pdf/CDRH127.pdf, Datasheet Version=01/2014, Family=FixedInductors, Frequency - Self Resonant=-, Height - Seated (Max)="0.315\"(8.00mm)", Manufacturer URL=http://www.sumida.com/, Material - Core=-, Mounting Technology=SurfaceMount, Mounting Type=SurfaceMount, Online Catalog=CDRHSeries, Other Names=308-1457-1, Packaging=CutTape(CT), Product Training Modules=PowerInductorBasics, Q @ Freq=-, Ratings=-, Series=CDRH127, Shielding=Shielded, Size / Dimension="0.472\"Lx0.472\"W(12.00mmx12.00mm)", Type=-
L2 L3: library part CMP-0227-00698-1, "SMD-Shielded Power Inductor WE-PD, L = 4.70 µH", Inductance="4.70 ÂµH", ComponentLink1Description="Manufacturer Link", ComponentLink1URL=http://www.we-online.com, ComponentLink2Description=Datasheet, ComponentLink2URL=http://www.we-online.de/katalog/media/pdf/744771004.pdf, DatasheetVersion="ver 7, Sep-2006", PackageDescription="SMD Inductor, 2-Leads, Body 12.0 x 12.0 mm", PackageReference=WE-PD-L, PackageVersion=2006
P1 P2 P3: "Header, 6-Pin, Dual row, Right Angle", LatestRevisionDate=17-Jul-2002, LatestRevisionNote="Re-released for DXP Platform.", Publisher="Altium Limited"
Q1: "N-Channel Power MOSFET", ComponentLink1Description="Manufacturer Link", ComponentLink1URL=http://www.irf.com/, DatasheetVersion=PD-9.814, LatestRevisionDate=17-Jul-2002, LatestRevisionNote="Re-released for DXP Platform.", Note="Pin 2 is electrically connected to pin 4.", PackageDescription="TO, Thru-Hole, Vertical, Heatsink Mounted; 3 In-Line Leads; Pitch 2.54 mm", PackageReference=TO-220AB, PackageVersion=Feb-1997, Published=8-Jun-2000, Publisher="Altium Limited"
R1 R2 R3 R4 R5 R6 R7 R8 R9 R10 R11 R12 R13 R14 R15 R16 R17 R18 R19 R20 R21 R22 R23 R24 R25 R26 R27 R28 R29 R30 R31: library part Res1, "Resistor", LatestRevisionDate=17-Jul-2002, LatestRevisionNote="Re-released for DXP Platform.", PackageDescription="Axial Device, Thru-Hole; 2 Leads; 0.3 in Pin Spacing", PackageReference=AXIAL-0.3, Published=8-Jun-2000, Publisher="Altium Limited"
TP1: library part Socket, LatestRevisionDate=17-Jul-2002, LatestRevisionNote="Re-released for DXP Platform.", Publisher="Altium Limited"
U2: library part Optoisolator1, "4-Pin Phototransistor Optocoupler", DatasheetVersion=Nov-2003, LatestRevisionDate=04-Mar-2005, LatestRevisionNote="Sch pins 3 & 4 Swapped.", PackageReference=DIP-4, Published=24-Mar-1999, Publisher="Altium Limited"
U3: library part CMP-0366-01028-2, "Adjustable Precision Shunt Regulator, 34 ppm / degC, 100 mA, 0 to 70 degC, 3-pin SOT-23 (DBZ), Green (RoHS & no Sb/Br)", Manufacturer="Texas Instruments", Rating=Catalog, Temp Coeff(Typ)(ppm/ degree C)=34, Code_JEDEC=TO-236, ComponentLink1Description="Manufacturer URL", ComponentLink1URL=http://www.ti.com/, ComponentLink2Description=Datasheet, ComponentLink2URL=http://www.ti.com/general/docs/lit/getliterature.tsp?genericPartNumber=TL431A&fileType=pdf, ComponentLink3Description="Package Specification", ComponentLink3URL=http://www.ti.com/litv/pdf/mpds108a, DatasheetVersion=SLVS543M, Eco-Plan="Green (RoHS & no Sb/Br)", Initial Accuracy @ 25/deg C(%)=1, Iout/Iz(Max)(mA)=100, Min Iz for Regulation(uA)=600, Mounting Technology="Surface Mount", PackageDescription="3-Pin Plastic Small Outline, Body 2.92 x 1.3 mm, Pitch 0.95 mm", PackageReference=DBZ0003A, PackageVersion=4203227/B, PartNumber=TL431ACDBZR, SubFamily="Shunt Voltage Reference", VO Adj(Max)(V)=36, VO Adj(Min)(V)=2.495
U4 U5: "Imported", Manufacturer="Texas Instruments", Manufacturer_Name="Texas Instruments", Manufacturer_Part_Number=TPS56339DDCR, PartNumber=TPS56339DDCR, RefDes=RefDes, Type=TYPE

## Via types
v1: diameter 0.6, hole 0.3, Top Layer to Bottom Layer, 77 vias
v2: diameter 1, hole 0.5, Top Layer to Bottom Layer, 41 vias

## Nets (pads, with @x,y where several pads share a name; then routed paths per layer and width w, separated by ;. In a path a pad name is that pad's centre, name@x,y a point inside that pad or via, vN(x,y) a via of type N, cw(c..) or ccw(c..) an arc to the next point about the centre after c; other vN are vias at no path point)
5V_A: C27.1 C28.1 C36.2 L2.2 P2.1 P2.2 R26.2
5V_C: C29.1 C30.1 C35.2 L3.2 P2.3 P2.4 R27.2
15V_A: C6.2 C7.1 C8.1 C23.1 C24.1 D2.2 P1.1 P1.2 R2.2 R24.2 U4.3 | length 10.1
  Bottom Layer w1.524: D2.2@68.072,42.926 D2.2@78.122,42.926
15V_B: C9.2 C10.1 C11.1 D5.2 P1.11 P1.12 R4.2 | length 10.1
  Bottom Layer w1.524: D5.2@68.072,30 D5.2@78.122,30
15V_C: C12.2 C13.1 C14.1 C25.1 C26.1 D7.2 P2.5 P2.6 P2.11 P2.12 R7.2 R14.2 R15.1 R25.2 U5.3 | length 24.2
  Bottom Layer w1.27: D7.2@67.95,15 D7.2@77.3,15 ; P2.6 74.22,11.92 D7.2@77.3,15 ; D7.2@78,15.7 D7.2@77.3,15
-5V_A: C31.2 C32.2 D10.1 D11.1 P1.5 P1.6 | length 24.1
  Top Layer w1: v2(59.22,40.274) 59.22,41.3 59.22,44.92 60.7,46.4 66.205,46.4 68.834,43.771 C31.2
  Bottom Layer w1: D10.1 D10.1@55.188,40.274 ; C32.2 55.199,43.673 55.199,40.285 D10.1@55.188,40.274 ; D11.1 v2(59.22,40.274) D10.1@55.188,40.274
-5V_B: C33.2 C34.2 D12.1 D13.1 P1.7 P1.8 | length 7
  Bottom Layer w1: C34.2 54.845,31.281 54.845,28.436 D13.1 D12.1
CS: R9.1 U1.5 | length 19.7
  Top Layer w0.75: R9.1 31.375,26.025 35.622,21.778 35.622,13.622 34.795,12.795 U1.5
DRV: R5.1 U1.6 | length 11.6
  Top Layer w0.508: v1(32.2,23.425) 32.2,22.1 34.739,19.561 34.739,14.739 34.095,14.095 33.645,14.095 33.633,14.083 33.143,14.083 U1.6
FB: C19.2 R18.1 R19.2 U1.3 | length 26.6
  Top Layer w0.508: U1.3 27.645,14.035 27.22,14.035 26.442,13.257 26.442,12.46 29.285,9.618 32.001,9.618 34.844,6.775 34.844,5.019 37.863,2 R19.2 39.15,1.85 40.183,0.817 43.017,0.817 v1(44.2,2)
  Bottom Layer w0.508: C19.2 v1(44.2,2)
GNDA: C6.1 C7.2 C8.2 C23.2 C24.2 C27.2 C28.2 C31.1 C32.1 P1.3 P1.4 R2.1 R28.1 R30.1 T1.11 U4.1 | length 6.8
  Bottom Layer w1: C32.1 59.932,43.7 T1.11
GNDAUX: C1.2 C2.2 C3.2 C4.2 C15.2 C16.1 C17.2 C18.1 D1.2 R10.1 R11.1 R13.2 R19.1 T1.3 U1.4 | length 20.2
  Top Layer w0.254: 45.2,0.975 45.144,1.031 45.144,2.833 45.2,2.889 45.2,3.3
  Top Layer w0.381: 44.5,4 45.2,3.3 ; 45.2,0.975 45.54,0.635
  Top Layer w0.508: C15.2 C17.2 ; R19.1 R13.2 44.5,4 ; 45.54,0.635 46.76,0.635 48,1.875 C18.1
  other v1: 20.6,6.6 26.6,6.6 28.6,6.6 36.6,6.6 25.6,8.6 27.6,8.6 35.6,8.6 20.6,10.6 24.6,10.6 26.6,10.6 30.6,10.6 32.6,10.6 34.6,10.6 36.6,10.6 3.6,12.6 9.6,12.6 11.6,12.6 13.6,12.6 15.6,12.6 17.6,12.6 19.6,12.6 21.6,12.6 31.6,12.6 37.6,12.6 12.6,14.6 14.6,14.6 36.6,14.6 38.6,14.6 11.6,16.6 13.6,16.6 15.6,16.6 17.6,16.6 37.6,16.6 2.6,18.6 12.6,18.6 14.6,18.6 16.6,18.6 18.6,18.6 20.6,18.6 36.6,18.6 38.6,18.6 40.6,18.6 3.6,20.6 19.6,20.6 21.6,20.6 2.6,22.6 4.6,22.6 36.6,22.6 40.6,22.6 42.6,22.6 3.6,24.6 35.6,24.6 41.6,24.6 2.6,26.6 4.6,26.6 20.6,26.6 36.6,26.6 3.6,28.6 19.6,28.6 21.6,28.6 20.6,30.6
GNDB: C9.1 C10.2 C11.2 C33.1 C34.1 P1.9 P1.10 R4.1 T1.8 | length 11.4
  Bottom Layer w1: C34.1 60.214,31.3 60.8,30.714 60.8,25.478 61.386,24.892 T1.8
GNDC: C12.1 C13.2 C14.2 C25.2 C26.2 C29.2 C30.2 P2.7 P2.8 P2.9 P2.10 R7.1 R21.1 R29.1 R31.1 T1.5 U3.3 U5.1 | length 4.2
  Top Layer w0.508: U3.3 59.135,2.37 59.69,2.925 R21.1
HV: C3.1 C4.1 C5.2 D3.1 L1.2 R1.2 T1.1 U1.8 | length 44.6
  Top Layer w0.508: C4.1 21.35,36.75 24.089,34.011 24.089,26.737 29.341,21.485 30.515,21.485 33.125,18.875 U1.8
  Bottom Layer w0.635: T1.1 40,45.842 40,47.19 40.372,47.562 D3.1 42.48,47.5 44.471,47.5 45.725,46.246 C5.2
  Bottom Layer w0.762: R1.2 C5.2
LIVE: D1.3 P3.9 P3.10 P3.11 P3.12
NetC1_1: C1.1 C2.1 D1.1 L1.1
NetC5_1: C5.1 R1.1 R3.2 | length 5.3
  Bottom Layer w0.762: C5.1 48.574,43.199 48.574,40.799 R1.1 50.775,40.7 R3.2
NetC18_2: C18.2 R13.1 R16.1 U2.4 | length 16.4
  Top Layer w0.254: R13.1 39.926,4 40.094,4.168 40.094,4.944 41,5.85 R16.1
  Top Layer w0.508: R16.1 41,6.15 41.271,6.421 41.421,6.421 41.73,6.73 v1(44.5,6.73) ; v1(49.7,2) C18.2
  Bottom Layer w0.508: v1(44.5,6.73) 44.508,6.722 48.548,6.722 49.7,5.57 v1(49.7,2)
NetC19_1: C19.1 R18.2 U2.3 | length 16.4
  Top Layer w0.508: v1(44.5,9.27) 46.05,7.72 R18.2
  Bottom Layer w0.508: v1(44.5,9.27) 43.692,8.462 43.692,6.395 45.875,4.212 C19.1
NetC20_1: C20.1 R17.1 R20.2 U2.2 U3.1 | length 15.5
  Top Layer w0.3: 55.224,9.25 55.919,9.945 57.18,9.945 58.68,11.445 58.98,11.445 60.305,12.77 60.305,12.995 60.68,13.37 R20.2 ; C20.1 55.901,7.606 55.901,5.233 55.9,3.445 55.94,3.405 U3.1
  Top Layer w0.762: U2.2 53.749,9.27 53.769,9.25 55.293,9.25 55.739,8.804 55.739,7.796 C20.1
NetC20_2: C20.2 R15.2 R20.1 R21.2 U3.2 | length 20.6
  Top Layer w0.3: U3.2 59.116,1.42 61.54,3.844 R15.2 ; R20.1 60.68,11.52 58.14,8.98 58.14,8.095 C20.2 58.585,7.62 58.761,7.796 58.761,8.462 58.998,8.699 60.611,8.699 61.165,8.145 61.471,8.145 R15.2@61.501,8.115
NetC21_1: C21.1 R22.1 | length 2.3
  Top Layer w0.635: C21.1 95.783,46.874 98.019,46.874 R22.1
NetC21_2: C21.2 L2.1 U4.2
NetC22_1: C22.1 R23.1
NetC22_2: C22.2 L3.1 U5.2 | length 8.2
  Bottom Layer w1: v2(96.266,26.67) 96.266,30.884 98.168,32.786 L3.1
NetC35_1: C35.1 R27.1 R31.2 U5.4
NetC36_1: C36.1 R26.1 R30.2 U4.4
NetD2_1: D2.1 T1.12 | length 12.1
  Bottom Layer w0.635: T1.12 63.5,43.9 65.2,42.2 65.2,40.835 65.572,40.463 67.995,40.463 D2.1@68.072,40.386
  Bottom Layer w1.524: T1.12 65.024,45.466 D2.1@68.072,45.466
NetD3_2: D3.2 D4.2 | length 19.2
  Bottom Layer w0.635: D3.2 42.418,39.972 43.69,38.7 45.7,38.7 47.1,37.3 47.1,31.55 49.91,28.74 D4.2@49.91,27.9
NetD4_1: D4.1 D6.1 Q1.2 T1.2 | length 25
  Top Layer w1.524: Q1.2@29.972,40.386 30.226,40.132 31.472,40.132 32.972,40.132 T1.2
  Bottom Layer w0.635: T1.2 40.328,40.132 40.7,39.76 40.7,36.3 41.948,35.052 D6.1 D4.1
  other v2: 26.972,36.686 28.472,36.686 29.972,36.686 31.472,36.686 32.972,36.686 26.972,38.186 28.472,38.186 29.972,38.186 31.472,38.186 32.972,38.186 26.972,39.686 28.472,39.686 29.972,39.686 31.472,39.686 32.972,39.686 26.972,41.186 28.472,41.186 29.972,41.186 31.472,41.186 32.972,41.186 26.972,42.686 28.472,42.686 29.972,42.686 31.472,42.686 32.972,42.686 26.972,44.186 28.472,44.186 29.972,44.186 31.472,44.186 32.972,44.186
NetD5_1: D5.1 T1.9 | length 13
  Bottom Layer w1.524: D5.1@68.072,27.46 64.742,27.46 T1.9 63.5,31.647 64.393,32.54 D5.1@68.072,32.54
NetD6_2: D6.2 R3.1 | length 11.5
  Bottom Layer w0.635: D6.2 50.283,35.495 50.283,36.383 52.85,38.95 52.85,43.303 52.478,43.675 R3.1
NetD7_1: D7.1 T1.6 | length 40.7
  Bottom Layer w1.524: T1.6 53.018,21.082 56.56,17.54 63.1,17.54 ; D7.1@67.95,12.46 63.993,12.46 63.1,13.353 63.1,17.54 ; D7.1@67.95,17.54 63.1,17.54
NetD8_1: D8.1 D9.1 R12.1 | length 14.5
  Bottom Layer w0.762: R12.1 42.541,12.722 43.812,13.993 49.837,13.993 51.384,12.446 D8.1 ; D8.1@51.308,12.446 51.308,15.685 D9.1
NetD10_2: D10.2 D11.2 T1.10 | length 8.4
  Bottom Layer w1: D10.2 55.188,36.274 59.22,36.274 D11.2 59.252,36.306 63.484,36.306 T1.10
NetD12_2: D12.2 D13.2 T1.7 | length 11.6
  Bottom Layer w1: D13.2 58.8,24.416 58.864,24.352 58.864,21.668 59.45,21.082 T1.7
NetQ1_1: Q1.1 R5.2 R8.2 | length 6.4
  Top Layer w0.762: R8.2 31.494,31.369 v1(32.766,31.369)
  Bottom Layer w0.75: R5.2@31.7,26.425 R5.2@31.95,26.175
  Bottom Layer w0.762: R5.2@31.95,26.175 R5.2 32.268,26.175 32.512,26.419 Q1.1
NetQ1_3: Q1.3 R8.1 R9.2 R11.2 | length 3.6
  Top Layer w0.75: v2(27.512,31.336) 27.555,31.293 28.582,31.293 R8.1 R9.2
NetR14_1: R14.1 R17.2 U2.1 | length 11.5
  Top Layer w0.3: v1(53.5,6.73) 53.468,6.73 52.446,7.752 52.446,10.187 53.704,11.445 R14.1 ; R14.1@56.98,11.445 57.355,11.82 57.355,11.889 58.305,12.839 58.305,12.92 58.68,13.295 R17.2
NetR22_2: R22.2 U4.6
NetR23_2: R23.2 U5.6
NetR24_1: R24.1 R28.2 U4.5
NetR25_1: R25.1 R29.2 U5.5
NEUTRAL: D1.4 P3.1 P3.2 P3.3 P3.4
VCC_AUX: C15.1 C16.2 C17.1 D8.2 D9.2 R16.2 U1.1 | length 25.6
  Top Layer w0.508: C16.2 v2(24.036,16.189) 24.451,16.605 U1.1
  Top Layer w1.524: v2(23.25,2.5) C17.1
  Bottom Layer w0.762: v2(23.25,2.5) 23.25,15.339 24.036,16.125 v2(24.036,16.189)
  other v1: 39.15,6
  other v2: 24.75,2.5 26.5,2.5 28,2.5 29.5,2.5 30.975,2.5
VS: R6.1 R10.2 TP1.1 U1.2 | length 8.8
  Top Layer w0.508: R10.2 21.65,13.75 22.992,15.092 25.135,15.092 25.378,15.335 U1.2
VS_Feed: R6.2 R12.2 T1.4 | length 26.6
  Top Layer w0.5: R6.2 21.5,16.875 23.421,18.796 v2(30.48,18.796)
  Bottom Layer w0.762: v2(30.48,18.796) 32.396,18.796 34.3,20.7 34.3,27.3 35.702,28.702 T1.4
pads on no net: P3.5 P3.6 P3.7 P3.8 U1.7 U1.9
copper on no net:
  other v1: 29.3,13.6 30.4,13.6 31.5,13.6 29.3,14.7 30.4,14.7 31.5,14.7 29.3,15.8 30.4,15.8

## Polygon pours and split planes (outlines as drawn)
GNDA on Top Layer "GNDA_L01_P019" (solid, pour order 19): 75.184,42.672 74.803,43.053 74.803,48.895 73.914,49.784 53.086,49.784 52.07,48.768 52.07,38.862 53.213,37.719 65.151,37.719 65.532,37.338 99.314,37.338 99.822,37.846 99.822,47.752 97.79,49.784 91.186,49.784 90.932,49.53 90.932,44.958 88.646,42.672
GNDAUX on Top Layer "GNDAUX" (solid, remove dead copper, pour order 9): 36.75,33.75 36.75,37.436 37.064,37.75 43,37.75 43,40 44.25,41.25 44.25,48.5 45,49.25 51,49.25 51.5,48.75 51.5,17.5 48.75,14.75 48.75,0.5 48.5,0.25 36.25,0.25 35.75,0.75 35.75,4.25 35,5 18.75,5 18.25,5.5 18.25,7.75 16.25,9.75 8.5,9.75 7.25,11 1.5,11 0.5,12 0.5,32.5 1.25,33.25 4.75,33.25 5,33 5,20.5 4.5,20 4.5,14 6,12.5 9.062,12.5 10.781,14.219 10.781,18.969 11.812,20 17.5,20 19,21.5 19,29.75 18.25,30.5 15,30.5 14.75,30.75 14.75,32.75 15,33 21.8,33 22.808,31.992 22.808,27.992 23.533,27.267 25.37,27.267 25.37,32.834 25.536,33 36,33
15V_A on Top Layer "15V_A_L01_P020" (solid, pour order 20): 75.062,49.408 75.062,43.16 75.291,42.931 88.524,42.931 90.658,45.065 90.673,45.065 90.673,49.652 90.678,49.657 90.551,49.784 75.438,49.784
HV on Top Layer "HV2" (solid, pour order 7): 36.3,42.745 36.83,42.215 42.037,42.215 42.5,42.672 42.5,48.5 42,49 20.875,49 18.375,46.5 12.75,46.5 12,47.25 12,49 11.5,49.5 1,49.5 0.5,49 0.5,42.5 1,42 12,42 14.5,39.5 14.5,35.5 15.5,34.5 23.59,34.5 23.59,45.828 23.81,46.086 24.286,46.086 24.3,46.1 36.1,46.1 36.3,45.9
NEUTRAL on Top Layer "NEUTRAL" (solid, pour order 10): 5.888,6.858 5.893,6.863 5.893,9.018 6.379,9.504 7.874,9.504 8.128,9.25 16,9.25 17.5,7.75 17.5,0.75 17.25,0.5 12.5,0.5 12,1 12,5.75 11.25,6.5 6.246,6.5
LIVE on Top Layer "LIVE" (solid, pour order 8): 0.5,1.5 1.5,0.5 6,0.5 7,1.5 7,5.5 6.5,6 5,6 4.5,6.5 4.5,9 4,9.5 1.5,9.5 1,9 0.5,8.5
NetC1_1 on Top Layer "HV1" (solid, pour order 5): 17.5,28.5 17,29 14,29 13,30 13,39 11.5,40.5 1.5,40.5 1,40 1,35.5 1.5,35 6,35 6.5,34.5 6.5,20 6,19.5 6,14.5 6.5,14 9,14 9.5,14.5 9.5,19.5 11.5,21.5 16.5,21.5 17.5,22.5
GNDAUX on Bottom Layer "GND_AUX" (solid, remove dead copper, pour order 18): 37.5,27.108 37.499,27.108 36.707,27.9 34.3,27.9 33.614,27.214 33.614,19.414 33.2,18.993 30.283,18.993 30,19.276 30,20 28,22 25.5,22 23,24.5 23,46.5 23.2,46.7 37.16,46.7 37.5,47.04 37.5,49.75 0.5,49.75 0.25,49.5 0.25,12.25 1.133,11.367 18.383,11.367 20.25,9.5 20.25,6.5 22.25,4.5 37.5,4.5 37.5,11.338 39.37,13.208 45.212,13.208 47.75,15.746 47.75,19.25 41.5,25.5 39.108,25.5
VCC_AUX on Bottom Layer "VCC_AUX" (solid, remove dead copper, pour order 17): 42,1.2 41.3,0.5 20.5,0.5 20,1 20,3.5 21,4.5 37.5,4.5 37.5,11.338 39.37,13.208 39.37,15.908 39.388,15.908 40.734,17.272 41.73,17.272 43,18.542 43,20 43.3,20.3 52.7,20.3 55.4,17.6 55.4,10 54.4,9 42,9
NetQ1_3 on Bottom Layer "FET_Source" (solid, pour order 11): 25.25,25 25.75,24.5 28.25,24.5 28.75,25 28.75,32.25 28.5,32.5 26.5,32.5 26.25,32.25 26.25,27.5 26,27.25 25.5,27.25 25.25,27
NetD4_1 on Bottom Layer "FET_Drain" (solid, pour order 13): 35.524,35.787 35.524,44.972 35.209,45.287 24.759,45.287 24.524,45.052 24.524,35.787 24.774,35.537 35.274,35.537

## Silkscreen, mask and mechanical layers (free items; w line width, h text height)
Top Overlay:
  the board outline again, w0.254
Bottom Overlay:
  lines w0.2: 96.564,46.353 96.564,46.353

## Text inside footprints (layer, text, board x,y; h text height)
T1: Top Overlay "PQ2620" at 46.482,31.75 h1.52